# Altium PCB PreTriggerECAL_v3.PcbDoc (part 2 of 3)
Units mm, origin at the board's own origin, x right, y up, seen from the top; angles counter-clockwise.
Board outline 200 x 130 mm, 8 copper layers (Top Layer, Internal Plane 1, Mid-Layer 1, Mid-Layer 2, Mid-Layer 3, Mid-Layer 4, Mid-Layer 5, Bottom Layer), stack 1.695 mm thick; 121 components, 209 nets, 2107 pads, 421 vias.
Unrouted connection lines stored in the file: 26.
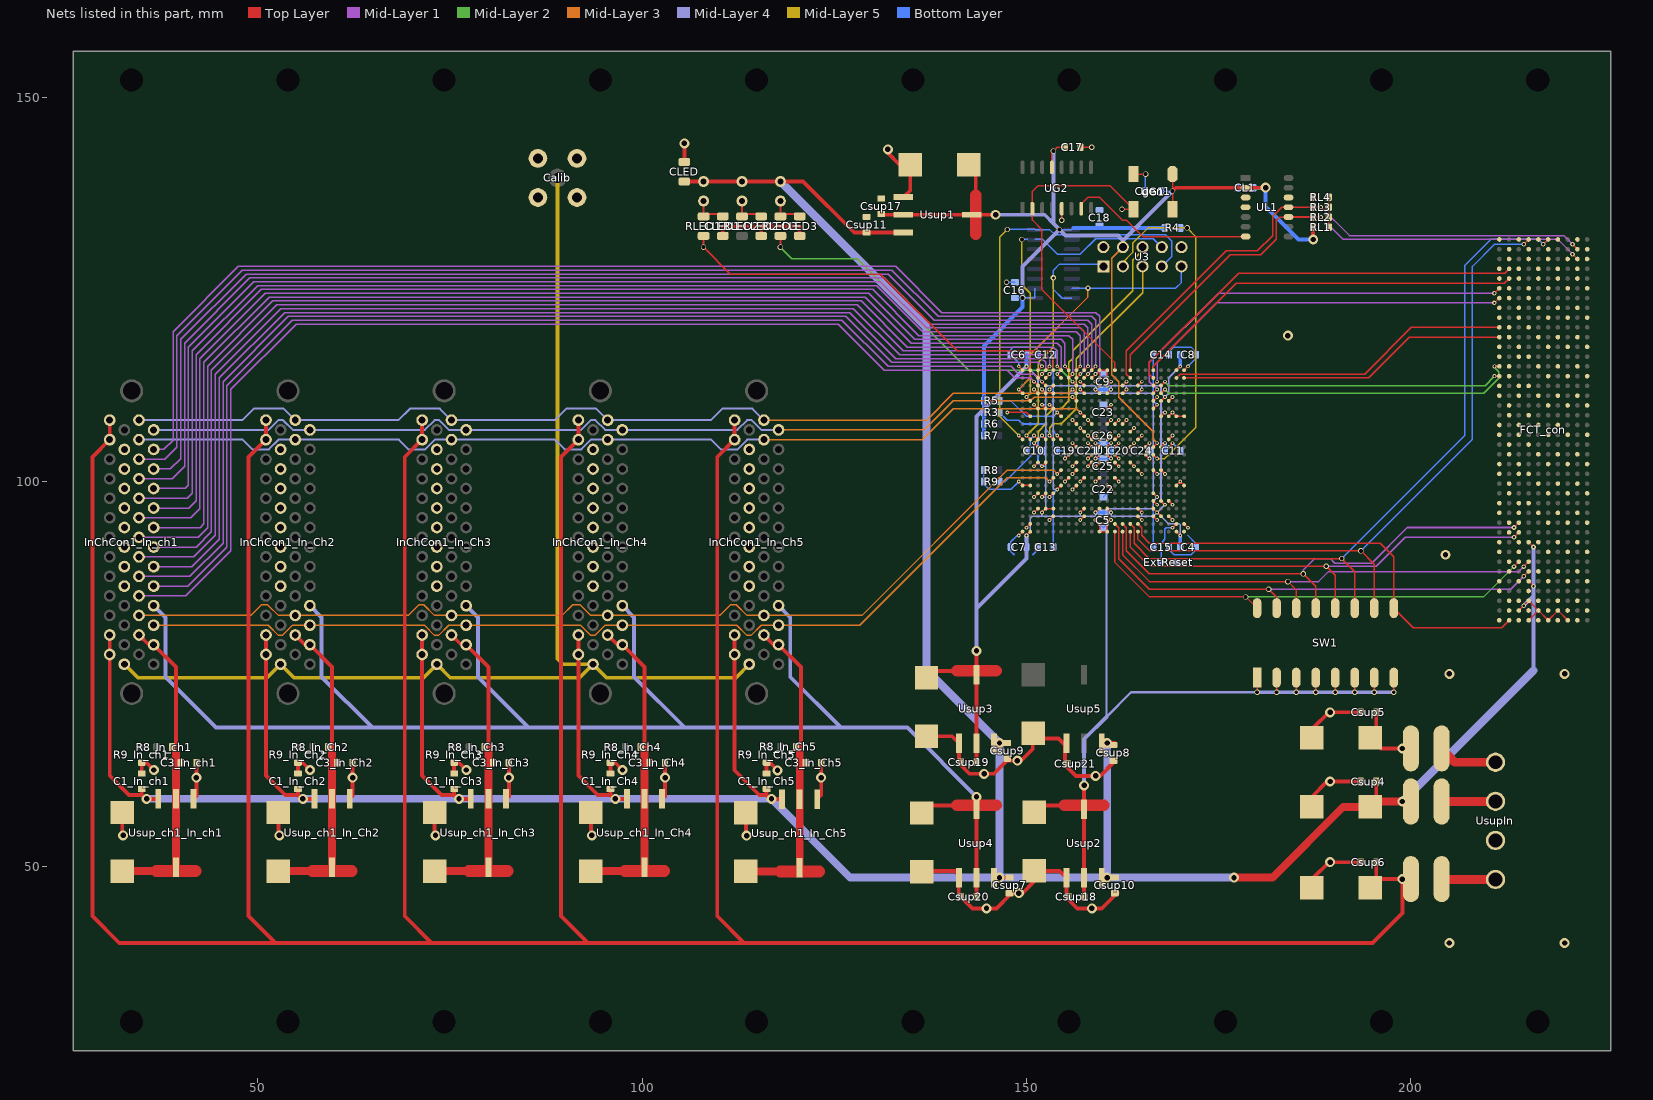
[diagram p8: the nets of this part, all layers, seen from the top]

## Via types
v1: diameter 0.5, hole 0.25, Top Layer to Bottom Layer, tented top, 267 vias
v2: diameter 0.6, hole 0.3, Top Layer to Bottom Layer, 60 vias
v3: diameter 1.3, hole 0.7, Top Layer to Bottom Layer, 50 vias
v4: diameter 0.7, hole 0.5, Top Layer to Bottom Layer, tented top, 30 vias
v5: diameter 0.5, hole 0.3, Top Layer to Bottom Layer, 4 vias
v6: diameter 2, hole 1.27, Top Layer to Bottom Layer, 2 vias
v7: diameter 0.7, hole 0.5, Top Layer to Bottom Layer, 2 vias
v8: diameter 0.7, hole 0.4, Top Layer to Bottom Layer, 2 vias
v9: diameter 1.27, hole 0.711, Top Layer to Bottom Layer, 2 vias
v10: diameter 3, hole 3, Top Layer to Bottom Layer, tented top, 2 vias

## Nets (pads, with @x,y where several pads share a name; then routed paths per layer and width w, separated by ;. In a path a pad name is that pad's centre, name@x,y a point inside that pad or via, vN(x,y) a via of type N, cw(c..) or ccw(c..) an arc to the next point about the centre after c; other vN are vias at no path point) (continued)
"+1.8 V": C2_In_ch1.+ C2_In_Ch2.+ C2_In_Ch3.+ C2_In_Ch4.+ C2_In_Ch5.+ C3_In_ch1.1 C3_In_Ch2.1 C3_In_Ch3.1 C3_In_Ch4.1 C3_In_Ch5.1 InChCon1_In_ch1.A23 InChCon1_In_ch1.A24 InChCon1_In_Ch2.A23 InChCon1_In_Ch2.A24 InChCon1_In_Ch3.A23 InChCon1_In_Ch3.A24 InChCon1_In_Ch4.A23 InChCon1_In_Ch4.A24 InChCon1_In_Ch5.A23 InChCon1_In_Ch5.A24 R8_In_ch1.2 R8_In_Ch2.2 R8_In_Ch3.2 R8_In_Ch4.2 R8_In_Ch5.2 Usup_ch1_In_ch1.2 Usup_ch1_In_ch1.4 Usup_ch1_In_Ch2.2 Usup_ch1_In_Ch2.4 Usup_ch1_In_Ch3.2 Usup_ch1_In_Ch3.4 Usup_ch1_In_Ch4.2 Usup_ch1_In_Ch4.4 Usup_ch1_In_Ch5.2 Usup_ch1_In_Ch5.4 | length 197.7
  Top Layer w0.508: InChCon1_In_ch1.A23@34.572,80.06 35.842,78.79 InChCon1_In_ch1.A24@36.477,78.79 39.37,75.897 39.37,65.479 ; InChCon1_In_Ch2.A23@54.892,80.06 56.162,78.79 InChCon1_In_Ch2.A24@56.797,78.79 59.69,75.897 59.69,65.479 ; InChCon1_In_Ch3.A23@75.212,80.06 76.482,78.79 InChCon1_In_Ch3.A24@77.117,78.79 80.01,75.897 80.01,65.479 ; InChCon1_In_Ch4.A23@95.532,80.06 96.802,78.79 InChCon1_In_Ch4.A24@97.437,78.79 100.33,75.897 100.33,65.479 ; InChCon1_In_Ch5.A23@115.852,80.06 117.122,78.79 InChCon1_In_Ch5.A24@117.757,78.79 120.65,75.897 120.65,65.479
  Top Layer w1.016: C2_In_ch1.+@32.385,49.35 36.83,49.35 Usup_ch1_In_ch1.4@39.37,49.35 ; Usup_ch1_In_ch1.4@39.37,49.858 Usup_ch1_In_ch1.2@39.37,58.748 39.37,65.479 ; C2_In_Ch2.+@52.705,49.35 57.15,49.35 Usup_ch1_In_Ch2.4@59.69,49.35 ; Usup_ch1_In_Ch2.4@59.69,49.858 Usup_ch1_In_Ch2.2@59.69,58.748 59.69,65.479 ; C2_In_Ch3.+@73.025,49.35 77.47,49.35 Usup_ch1_In_Ch3.4@80.01,49.35 ; Usup_ch1_In_Ch3.4@80.01,49.858 Usup_ch1_In_Ch3.2@80.01,58.748 80.01,65.479 ; C2_In_Ch4.+@93.345,49.35 97.79,49.35 Usup_ch1_In_Ch4.4@100.33,49.35 ; Usup_ch1_In_Ch4.4@100.33,49.858 Usup_ch1_In_Ch4.2@100.33,58.748 100.33,65.479 ; C2_In_Ch5.+@113.515,49.302 117.96,49.302 ; 118.11,49.35 Usup_ch1_In_Ch5.4@120.65,49.35 ; Usup_ch1_In_Ch5.4@120.5,49.61 Usup_ch1_In_Ch5.4@120.5,49.81 Usup_ch1_In_Ch5.2@120.5,58.7 120.5,65.231
"+1.8 VDIG": Csup15.+ Csup20.1 InChCon1_In_ch1.A20 InChCon1_In_Ch2.A20 InChCon1_In_Ch3.A20 InChCon1_In_Ch4.A20 InChCon1_In_Ch5.A20 Usup4.2 Usup4.4 | length 218.4
  Top Layer w0.508: Csup15.+@136.89,57.898 140.96,57.898 Usup4.4@143.5,57.898 ; Csup20.1@143.5,46 Csup20.1@143.5,46.356 Usup4.2@143.5,48.5 Usup4.4@143.5,57.39 Usup4.4@143.5,57.898 ; v3(143.5,59) Usup4.4@143.5,57.898
  Mid-Layer 4 w0.508: InChCon1_In_ch1.A20@36.477,83.87 38,82.348 38,74.6 44.6,68 64.92,68 ; InChCon1_In_Ch2.A20@56.797,83.87 58.32,82.348 58.32,74.6 64.92,68 ; InChCon1_In_Ch3.A20@77.117,83.87 78.64,82.348 78.64,74.6 85.24,68 ; InChCon1_In_Ch4.A20@97.437,83.87 98.96,82.348 98.96,74.6 105.56,68 ; InChCon1_In_Ch5.A20@117.757,83.87 119.28,82.348 119.28,74.6 125.88,68 ; v3(143.5,59) 134.5,68 125.88,68 ; 64.92,68 85.24,68 ; 85.24,68 105.56,68 ; 105.56,68 125.88,68
"+2.5 V": C4.2 C5.2 C6.2 C7.2 C8.2 C9.2 C10.2 C11.2 C12.2 C13.2 C14.2 C15.2 Csup13.+ Csup14.+ Csup18.1 Csup19.1 SW1.1 SW1.3 SW1.5 SW1.7 SW1.9 SW1.11 SW1.13 SW1.15 U1.A2 U1.A21 U1.AB2 U1.AB21 U1.D4 U1.D5 U1.D9 U1.D11 U1.D12 U1.D14 U1.D16 U1.E19 U1.F4 U1.F18 U1.G6 U1.G19 U1.K4 U1.L19 U1.N4 U1.P18 U1.T6 U1.U4 U1.U18 U1.V19 U1.W4 U1.W5 U1.W9 U1.W11 U1.W12 U1.W16 U1.W18 U1.Y19 Usup2.2 Usup2.4 Usup3.2 Usup3.4 | length 387.7
  Top Layer w0.175: v1(150,93) U1.AB2@150.5,93.5 ; v1(150,115) U1.A2@150.5,114.5 ; v1(152,96) U1.W4@152.5,96.5 U1.W5@153.5,96.5 ; v1(152,98) U1.U4@152.5,98.5 ; v1(152,102) U1.N4@152.5,102.5 ; v1(152,106) U1.K4@152.5,105.5 ; v1(152,110) U1.F4@152.5,109.5 ; v1(152,112) U1.D4@152.5,111.5 U1.D5@153.5,111.5 ; v1(154,99) U1.T6@154.5,99.5 ; v1(154,109) U1.G6@154.5,108.5 ; v1(157,96) U1.W9@157.5,96.5 ; v1(157,112) U1.D9@157.5,111.5 ; v1(159,96) U1.W11@159.5,96.5 ; v1(159,112) U1.D11@159.5,111.5 ; U1.W12@160.5,96.5 v1(161,96) ; U1.D12@160.5,111.5 v1(161,112) ; U1.D14@162.5,111.5 v1(163,112) ; U1.W16@164.5,96.5 v1(165,96) ; U1.D16@164.5,111.5 v1(165,112) ; U1.W18@166.5,96.5 v1(167,96) U1.Y19@167.5,95.5 ; U1.U18@166.5,98.5 v1(167,98) ; U1.P18@166.5,101.5 v1(167,101) ; U1.F18@166.5,109.5 v1(167,110) ; U1.V19@167.5,97.5 v1(168,97) ; U1.L19@167.5,104.5 v1(168,105) ; U1.G19@167.5,108.5 v1(168,109) ; U1.E19@167.5,110.5 v1(168,111) ; U1.AB21@169.5,93.5 v1(170,93) ; U1.A21@169.5,114.5 v1(170,115)
  Top Layer w0.2: v4(180,72.6) SW1.1@180,74.5 ; v4(182.54,72.6) SW1.3@182.54,74.5 ; v4(185.08,72.6) SW1.5@185.08,74.5 ; v4(187.62,72.6) SW1.7@187.62,74.5 ; v4(190.16,72.6) SW1.9@190.16,74.5 ; v4(192.7,72.6) SW1.11@192.7,74.5 ; v4(195.24,72.6) SW1.13@195.24,74.5 ; v4(197.78,72.6) SW1.15@197.78,74.5
  Top Layer w0.508: Csup14.+@136.89,75.398 143.5,75.398 v3(143.5,78) ; Csup19.1@143.5,63.356 Csup19.1@143.5,63.5 Csup19.1@143.5,63.856 Usup3.4@143.5,74.89 ; Csup13.+@150.89,57.898 154.96,57.898 157.5,57.898 v3(157.5,60.5) ; Csup18.1@157.5,45.856 Csup18.1@157.5,46 Csup18.1@157.5,46.356 Usup2.2@157.5,48.5 Usup2.4@157.5,57.39
  Mid-Layer 4 w0.2: v1(150,93) 150.5,93.5 150.5,95.207 150.793,95.5 152,95.5 ; v1(150,115) 151.5,113.5 151.5,112.5 152.5,111.5 ; v1(152,98) 152.5,98 ; v1(152,102) 152.5,102 ; v1(152,110) 152.5,110 ; v1(154,99) 153.5,99 153.5,108.5 ; v1(154,109) 153.5,108.5 ; v1(157,96) 157,95.5 ; v1(157,112) 157,112.5 ; v1(159,96) 159,95.5 157,95.5 ; v1(159,112) 159,112.5 ; 160.6,96.5 166.3,96.5 166.5,96.7 166.5,97.5 v1(167,98) 166.5,98.5 166.5,109.5 ; v1(161,96) 161,95.5 165,95.5 ; v1(161,112) 161,112.5 ; v1(163,112) 163,112.5 ; v1(165,96) 165,95.5 ; v1(165,112) 165,112.5 ; v1(167,101) 167.5,101 ; v1(167,110) 166.5,109.5 ; 167.5,109 v1(168,109) ; v1(168,105) 167.5,105 ; v1(170,93) 170,94.4 169.9,94.5 168.5,94.5 v1(167,96) ; v1(170,115) 168.5,113.5 168.5,111.5 v1(168,111) ; 152,95.5 v1(152,96) 152.5,96.5 152.5,98 ; 152,95.5 157,95.5 ; 152.5,98 152.5,102 ; 152.5,102 152.5,110 ; 152.5,110 152.5,111.5 ; 152.5,111.5 152.5,112.5 157,112.5 ; 153.5,108.5 153.5,111.3 153.7,111.5 163.793,111.5 166.207,111.5 166.5,111.207 166.5,109.5 ; 157,112.5 163,112.5 ; 163,112.5 165,112.5 ; 165,95.5 166.5,95.5 v1(167,96) ; 165,112.5 167.3,112.5 167.5,112.3 167.5,111.5 v1(168,111) ; v1(167,96) v1(168,97) 167.5,97.5 167.5,105 ; 167.5,105 167.5,110.5 v1(168,111)
  Mid-Layer 4 w0.3: 160.6,96.5 160.4,96.3 160.4,69.4 163.6,72.6 v4(180,72.6)
  Mid-Layer 4 w0.5: v4(180,72.6) v4(182.54,72.6) v4(185.08,72.6) v4(187.62,72.6) v4(190.16,72.6) v4(192.7,72.6) v4(195.24,72.6) v4(197.78,72.6)
  Mid-Layer 4 w0.508: v3(143.5,78) 143.5,83.5 ; v1(150,93) 150,90 143.5,83.5 ; v1(150,115) 143.5,108.5 143.5,83.5 ; v3(157.5,60.5) 157.5,66.5 160.4,69.4
  Bottom Layer w0.2: v1(152,102) 151.5,102.5 151.5,105.5 v1(152,106) ; C13.2@153.497,91.5 153.497,98.497 v1(154,99) ; C12.2@153.5,116.5 C12.2@153.5,116.144 153.5,109.5 v1(154,109) ; C15.2@166.5,91.5 C15.2@166.5,91.856 166.5,97.5 v1(167,98) ; C14.2@166.5,116.5 166.5,110.5 v1(167,110)
  Bottom Layer w0.508: C7.2@150,91.5 C7.2@150,91.856 v1@150,92.996 ; v1(150,115) C6.2@150,116.144 C6.2@150,116.5 ; v1(159,96) C5.2@159.644,96 ; v1(159,112) C9.2@159.644,112 ; C5.2@160,96 C5.2@160.356,96 v1(161,96) ; C9.2@160,112 C9.2@160.356,112 v1(161,112) ; C11.2@168,104.356 v1(168,105) ; C4.2@170,91.856 v1(170,93) ; v1(170,115) C8.2@170,116.144 C8.2@170,116.5
"+3.3 V": C16.2 C17.2 C18.1 Cgen1.2 CL1.1 Csup12.+ Csup17.1 R3.1 R4.1 R5.1 R6.1 R7.1 RL1.2 U1.L18 U3.4 UG1.1 UG1.4 UG2.13 UL1.2 Usup1.2 Usup1.4 | length 171.1
  Top Layer w0.175: U1.L18@166.5,104.5 v1(167,105)
  Top Layer w0.2: UG2.13@153.31,140.885 153.31,142.81 v4(153.5,143) 154,143.5 C17.2@154.714,143.5 ; UG1.4@169,135.428 v4(169,137.8) UG1.1@169,140
  Top Layer w0.508: Csup17.1@131.268,134.714 Usup1.2@134,134.714 Usup1.4@142.89,134.714 ; Csup12.+@143.398,141.324 143.398,137.254 143.398,134.714 v3(146,134.714) ; v4(169,137.8) 169.43,138.23 UL1.2@178.5,138.23 v3(181.102,138.23) ; RL1.2@187.268,133.1 RL1.2@187.268,132.744 187.268,131.532 v3(187.3,131.5)
  Mid-Layer 3 w0.175: U3.4@162.54,130.5 161.075,129.035 161.075,113.925 162,113 162,111 166.5,106.5 166.5,105.5 v1(167,105)
  Mid-Layer 4 w0.508: v3(146,134.714) 152.376,134.714 153.5,133.59 ; v4(149.5,123.9) 149.5,127.99 v4(154.3,132.79) ; v4(153.5,143) 153.5,133.59 ; U3.4@162.54,130.5 162.54,131.34 ; v4(169,137.8) 162.54,131.34 ; 153.5,133.59 v4(154.3,132.79) ; v4(154.3,132.79) 155.09,132 161.88,132 162.54,131.34
  Bottom Layer w0.2: C16.2@148.856,123.9 v4(149.5,123.9) 151.1,123.9 151.1,125.17 ; v4(154.3,132.79) 155.9,132.79 ; Cgen1.2@167.286,137.8 Cgen1.2@167.5,137.8 Cgen1.2@167.754,137.8 v4(169,137.8)
  Bottom Layer w0.508: R7.1@144.468,106 R7.1@144.468,106.356 R6.1@144.468,107.144 R6.1@144.468,107.5 R3.1@144.468,108.644 R3.1@144.468,109 R3.1@144.468,109.356 144.468,117.668 149.5,122.7 v4(149.5,123.9) ; 156.11,133 R4.1@167.746,133 R4.1@168,133 ; CL1.1@179.5,138.23 CL1.1@179.754,138.23 v3(181.102,138.23) 181.102,135.798 185.4,131.5 v3(187.3,131.5)
"+5 V": C1_In_ch1.1 C1_In_Ch2.1 C1_In_Ch3.1 C1_In_Ch4.1 C1_In_Ch5.1 CLED.1 Csup1.+ Csup4.1 Csup7.1 Csup8.1 Csup9.1 Csup10.1 Csup11.1 FCT_con.C39 FCT_con.D32 FCT_con.D36 FCT_con.D38 FCT_con.D40 FCT_con.E39 FCT_con.F40 FCT_con.G39 FCT_con.H40 InChCon1_In_ch1.B23 InChCon1_In_ch1.B25 InChCon1_In_Ch2.B23 InChCon1_In_Ch2.B25 InChCon1_In_Ch3.B23 InChCon1_In_Ch3.B25 InChCon1_In_Ch4.B23 InChCon1_In_Ch4.B25 InChCon1_In_Ch5.B23 InChCon1_In_Ch5.B25 Lref1.2 Usup1.3 Usup2.3 Usup3.3 Usup4.3 Usup5.3 Usup_ch1_In_ch1.3 Usup_ch1_In_Ch2.3 Usup_ch1_In_Ch3.3 Usup_ch1_In_Ch4.3 Usup_ch1_In_Ch5.3 VDLED1.ANOD VDLED2.ANOD VDLED3.ANOD | length 516.1
  Top Layer w0.2: FCT_con.C39@214.04,83.24 v2(214.675,83.875) FCT_con.D38@215.31,84.51 FCT_con.E39@216.58,83.24 ; FCT_con.D40@215.31,81.97 FCT_con.E39@216.58,83.24 ; FCT_con.D36@215.31,87.05 v2(215.945,86.415) ; FCT_con.D32@215.31,92.13 v2(215.945,91.495) ; FCT_con.H40@220.39,81.97 FCT_con.G39@219.12,83.24 FCT_con.F40@217.85,81.97 FCT_con.E39@216.58,83.24
  Top Layer w0.508: InChCon1_In_ch1.B23@30.762,80.06 InChCon1_In_ch1.B25@30.762,77.52 30.762,61.768 33.274,59.256 34.925,59.256 ; C1_In_ch1.1@34.925,59.764 34.925,59.256 ; Usup_ch1_In_ch1.3@37.084,58.748 v3(35.56,58.748) 35.433,58.748 34.925,59.256 ; InChCon1_In_Ch2.B23@51.082,80.06 InChCon1_In_Ch2.B25@51.082,77.52 51.082,61.768 53.594,59.256 55.245,59.256 ; C1_In_Ch2.1@55.245,59.764 55.245,59.256 ; Usup_ch1_In_Ch2.3@57.404,58.748 v3(55.88,58.748) 55.753,58.748 55.245,59.256 ; InChCon1_In_Ch3.B23@71.402,80.06 InChCon1_In_Ch3.B25@71.402,77.52 71.402,61.768 73.914,59.256 75.565,59.256 ; C1_In_Ch3.1@75.565,59.764 75.565,59.256 ; Usup_ch1_In_Ch3.3@77.724,58.748 v3(76.2,58.748) 76.073,58.748 75.565,59.256 ; InChCon1_In_Ch4.B23@91.722,80.06 InChCon1_In_Ch4.B25@91.722,77.52 91.722,61.768 94.234,59.256 95.885,59.256 ; C1_In_Ch4.1@95.885,59.764 95.885,59.256 ; Usup_ch1_In_Ch4.3@98.044,58.748 v3(96.52,58.748) 96.393,58.748 95.885,59.256 ; CLED.1@106.008,139.04 VDLED1.ANOD@108,139.04 VDLED2.ANOD@113,139.04 VDLED3.ANOD@118,139.04 120.96,139.04 127.6,132.4 Csup11.1@128.844,132.4 Csup11.1@128.946,132.4 ; InChCon1_In_Ch5.B23@112.042,80.06 InChCon1_In_Ch5.B25@112.042,77.52 112.042,62.457 115.244,59.256 116.205,59.256 ; C1_In_Ch5.1@116.205,59.764 116.205,59.256 ; Usup_ch1_In_Ch5.3@118.214,58.7 118.166,58.748 v3(116.84,58.748) 116.713,58.748 116.205,59.256 ; Csup11.1@129.228,132.428 Usup1.3@134,132.428 ; Usup4.3@145.786,48.5 v3(146.5,48.5) Csup7.1@147.444,48.5 ; Usup3.3@145.786,66 v3(146.5,66) Csup9.1@147.144,66 Csup9.1@147.444,66 ; Usup2.3@159.786,48.5 v3(160.5,48.5) Csup10.1@161.144,48.5 Csup10.1@161.444,48.5 ; Usup5.3@159.786,66 v3(160.5,66) Csup8.1@161.444,66 ; Csup1.+@195.4,58.4 195.5,58.5 Csup4.1@195.5,60.644 Csup4.1@195.5,61
  Top Layer w1.016: v3(177,48.5) 182,48.5 191.2,57.7 Csup1.+@194.7,57.7 ; Csup1.+@195.4,58.4 v3(198.9,58.4)
  Mid-Layer 4 w0.5: v2(214.675,83.875) 215.945,85.145 ; 215.945,75.445 215.945,85.145 ; v2(215.945,91.495) v2(215.945,86.415) 215.945,85.145
  Mid-Layer 4 w1.016: v3(35.56,58.748) v3(55.88,58.748) v3(76.2,58.748) v3(96.52,58.748) v3(116.84,58.748) 127.088,48.5 v3(146.5,48.5) ; VDLED3.ANOD@118,139.04 137,120.04 137,75.5 v3(146.5,66) v3(146.5,48.5) ; v3(160.5,66) v3(160.5,48.5) ; v3(177,48.5) v3(160.5,48.5) ; v3(198.9,58.4) 215.945,75.445 ; v3(146.5,48.5) v3(160.5,48.5)
"+5IN V": Lref1.1 UsupIn.2 | length 7
  Top Layer w1.16: Lref1.1@204,58.42 UsupIn.2@211,58.42
"+12 V": Csup2.+ Csup5.1 Lref2.2 | length 8.4
  Top Layer w0.254: Csup2.+@195.5,67.5 Csup2.+@194.7,66.7 Csup2.+@196.1,65.3 ; Csup5.1@195.5,69.644 Csup5.1@195.5,70
  Top Layer w0.508: Csup2.+@195.5,67.5 Csup5.1@195.5,69.644 ; Csup2.+@196.1,65.3 v3(198.9,65.3)
"+12IN V": Lref2.1 UsupIn.1 | length 7.8
  Top Layer w1.16: Lref2.1@203.93,65.278 205.708,63.5 UsupIn.1@211,63.5
"-5 V": Csup3.+ Csup6.1 InChCon1_In_ch1.B1 InChCon1_In_ch1.B3 InChCon1_In_Ch2.B1 InChCon1_In_Ch2.B3 InChCon1_In_Ch3.B1 InChCon1_In_Ch3.B3 InChCon1_In_Ch4.B1 InChCon1_In_Ch4.B3 InChCon1_In_Ch5.B1 InChCon1_In_Ch5.B3 Lref3.2 | length 530.9
  Top Layer w0.508: InChCon1_In_ch1.B1@30.762,108 InChCon1_In_ch1.B3@30.762,105.46 28.5,103.198 28.5,43.5 32,40 195,40 198.9,43.9 v3(198.9,48.3) 195.8,48.3 195.5,48 Csup6.1@195.5,50.144 Csup6.1@195.5,50.5 ; InChCon1_In_Ch2.B1@51.082,108 InChCon1_In_Ch2.B3@51.082,105.46 48.82,103.198 48.82,43.5 52.32,40 ; InChCon1_In_Ch3.B1@71.402,108 InChCon1_In_Ch3.B3@71.402,105.46 69.14,103.198 69.14,43.5 72.64,40 ; InChCon1_In_Ch4.B1@91.722,108 InChCon1_In_Ch4.B3@91.722,105.46 89.46,103.198 89.46,43.5 92.96,40 ; InChCon1_In_Ch5.B1@112.042,108 InChCon1_In_Ch5.B3@112.042,105.46 109.78,103.198 109.78,43.5 113.28,40
"-5IN V": Lref3.1 UsupIn.4 | length 7
  Top Layer w1.16: Lref3.1@204,48.26 UsupIn.4@211,48.26
ADC_CLK_N: InChCon1_In_ch1.A22 InChCon1_In_Ch2.A22 InChCon1_In_Ch3.A22 InChCon1_In_Ch4.A22 InChCon1_In_Ch5.A22 U1.R5 | length 129.8
  Top Layer w0.175: v1(153,100) U1.R5@153.5,100.5
  Mid-Layer 3 w0.2: InChCon1_In_ch1.A22@36.477,81.33 51.37,81.33 52.7,80 53.2,80 54.53,81.33 InChCon1_In_Ch2.A22@56.797,81.33 71.69,81.33 73.02,80 73.52,80 74.85,81.33 InChCon1_In_Ch3.A22@77.117,81.33 92.01,81.33 93.34,80 93.84,80 95.17,81.33 InChCon1_In_Ch4.A22@97.437,81.33 112.33,81.33 113.66,80 114.16,80 115.49,81.33 InChCon1_In_Ch5.A22@117.757,81.33 128.33,81.33 147.5,100.5 152.5,100.5 v1(153,100)
ADC_CLK_P: InChCon1_In_ch1.A21 InChCon1_In_Ch2.A21 InChCon1_In_Ch3.A21 InChCon1_In_Ch4.A21 InChCon1_In_Ch5.A21 U1.P6 | length 132.8
  Top Layer w0.175: v1(154,101) U1.P6@154.5,101.5
  Mid-Layer 3 w0.2: InChCon1_In_ch1.A21@34.572,82.6 49.1,82.6 50.5,84 51.3,84 52.7,82.6 InChCon1_In_Ch2.A21@54.892,82.6 69.6,82.6 71,84 71.62,84 73.02,82.6 InChCon1_In_Ch3.A21@75.212,82.6 89.6,82.6 91,84 91.94,84 93.34,82.6 InChCon1_In_Ch4.A21@95.532,82.6 110.1,82.6 111.5,84 112.26,84 113.66,82.6 InChCon1_In_Ch5.A21@115.852,82.6 128.6,82.6 147.5,101.5 153.5,101.5 v1(154,101)
ADC_CSB: InChCon1_In_ch1.A1 InChCon1_In_Ch2.A1 InChCon1_In_Ch3.A1 InChCon1_In_Ch4.A1 InChCon1_In_Ch5.A1 U1.D8 | length 128.8
  Top Layer w0.175: v1@155.975,112 v1(156,112) U1.D8@156.5,111.5
  Mid-Layer 3 w0.175: InChCon1_In_Ch5.A1@115.852,108 137,108 140.5,111.5 155.5,111.5 v1(156,112)
  Mid-Layer 4 w0.254: InChCon1_In_ch1.A1@34.572,108 48,108 49.5,109.5 53.392,109.5 InChCon1_In_Ch2.A1@54.892,108 68.32,108 69.82,109.5 73.712,109.5 InChCon1_In_Ch3.A1@75.212,108 88.64,108 90.14,109.5 94.032,109.5 InChCon1_In_Ch4.A1@95.532,108 108.96,108 110.46,109.5 114.352,109.5 InChCon1_In_Ch5.A1@115.852,108
ADC_SCLK: InChCon1_In_ch1.A3 InChCon1_In_Ch2.A3 InChCon1_In_Ch3.A3 InChCon1_In_Ch4.A3 InChCon1_In_Ch5.A3 U1.G9 | length 129.2
  Top Layer w0.175: v1(157,109) U1.G9@157.5,108.5
  Mid-Layer 3 w0.175: InChCon1_In_Ch5.A3@115.852,105.46 136.46,105.46 140.5,109.5 156.5,109.5 v1(157,109)
  Mid-Layer 4 w0.254: InChCon1_In_ch1.A3@34.572,105.46 48.04,105.46 49.3,104.2 51.457,104.2 52.717,105.46 InChCon1_In_Ch2.A3@54.892,105.46 68.36,105.46 69.62,104.2 71.777,104.2 73.037,105.46 InChCon1_In_Ch3.A3@75.212,105.46 88.68,105.46 89.94,104.2 92.097,104.2 93.357,105.46 InChCon1_In_Ch4.A3@95.532,105.46 109,105.46 110.26,104.2 112.417,104.2 113.677,105.46 InChCon1_In_Ch5.A3@115.852,105.46
ADC_SDIO/ODM: InChCon1_In_ch1.A2 InChCon1_In_Ch2.A2 InChCon1_In_Ch3.A2 InChCon1_In_Ch4.A2 InChCon1_In_Ch5.A2 U1.E8 | length 126.2
  Top Layer w0.175: v1(156,111) U1.E8@156.5,110.5
  Mid-Layer 3 w0.175: InChCon1_In_Ch5.A2@117.757,106.73 136.73,106.73 140.5,110.5 150.5,110.5 151,111 v1(156,111)
  Mid-Layer 4 w0.254: InChCon1_In_ch1.A2@36.477,106.73 51.43,106.73 52.7,108 53.3,108 54.57,106.73 InChCon1_In_Ch2.A2@56.797,106.73 71.75,106.73 73.02,108 73.62,108 74.89,106.73 InChCon1_In_Ch3.A2@77.117,106.73 92.07,106.73 93.34,108 93.94,108 95.21,106.73 InChCon1_In_Ch4.A2@97.437,106.73 112.39,106.73 113.66,108 114.26,108 115.53,106.73 InChCon1_In_Ch5.A2@117.757,106.73
"AS ASD": U1.D1 U3.9 | length 34.3
  Top Layer w0.175: v1(149,112) U1.D1@149.5,111.5
  Mid-Layer 3 w0.2: v1(149,112) 150.5,113.5 150.5,116.5 158,124 v8(158,125.17)
  Bottom Layer w0.2: 155.9,125.17 v8(158,125.17) 169.43,125.17 170.16,125.9 U3.9@170.16,128
"AS DATA": U1.K1 U3.7 | length 54.8
  Top Layer w0.175: v1(149,106) U1.K1@149.5,105.5
  Mid-Layer 5 w0.2: v4(147.5,132.8) 146.5,131.8 146.5,108.5 v1(149,106)
  Bottom Layer w0.2: v4(147.5,132.8) 151.09,132.8 151.1,132.79 153.01,132.79 153.7,132.1 168.1,132.1 168.9,131.3 168.9,129.3 U3.7@167.6,128
"AS DCLK": U1.K2 U3.1 | length 35
  Top Layer w0.175: v1(150,106) U1.K2@150.5,105.5
  Mid-Layer 5 w0.175: v1(150,106) 151.5,107.5 151.5,115.5 153.5,117.5 v8(153.5,126.5)
  Bottom Layer w0.2: 155.9,123.9 155.9,123.855 154.645,123.855 153.5,125 v8(153.5,126.5) 153.5,127.5 154.3,128.3 159.7,128.3 U3.1@160,128
"AS NCE": R9.1 U1.L3 U3.6 | length 39.7
  Top Layer w0.175: v1(151,105) U1.L3@151.5,104.5
  Mid-Layer 5 w0.175: v1(151,105) 151.5,105.5 151.5,106.5 152.5,107.5 152.5,108.5 153.5,109.5 154.5,109.5 155.5,110.5 155.5,115.5 156,116 156,117 163.8,124.8 163.8,128.8 165.1,130.1 U3.6@165.1,130.5
  Bottom Layer w0.2: R9.1@146.754,100 147.2,100 151,103.8 v1(151,105)
"AS NCS": U1.E2 U3.8 | length 41.2
  Top Layer w0.175: v1(150,111) U1.E2@150.5,110.5
  Mid-Layer 5 w0.2: v4(149.4,131.5) 149.4,125.6 150.5,124.5 150.5,111.5 v1(150,111)
  Bottom Layer w0.2: v4(149.4,131.5) 150.144,131.5 ; 151.1,131.52 152.08,131.52 154,129.6 157,129.6 159,131.6 166.5,131.6 U3.8@167.6,130.5
"BEAM TIME_N": FCT_con.B5 U1.A18 | length 51.5
  Top Layer w0.175: U1.A18@166.5,114.5 166.5,115 177.3,125.8 212.15,125.8 FCT_con.B5@212.77,126.42
"BEAM TIME_P": FCT_con.B4 U1.B18 | length 54
  Top Layer w0.175: U1.B18@166.5,113.5 166,114 166,115.5 177.6,127.1 212.18,127.1 FCT_con.B4@212.77,127.69
BUSY_N: FCT_con.A7 U1.C18 | length 51.2
  Top Layer w0.175: U1.C18@166.5,112.5 v1(167,113)
  Top Layer w0.2: v2(210.865,123.245) FCT_con.A7@211.5,123.88
  Mid-Layer 1 w0.175: v1(167,113) 167,115.5 174.745,123.245 v2(210.865,123.245)
BUSY_P: FCT_con.A6 U1.D18 | length 54.1
  Top Layer w0.175: U1.D18@166.5,111.5 v1(167,112)
  Top Layer w0.2: v2(210.865,124.515) FCT_con.A6@211.5,125.15
  Mid-Layer 1 w0.175: v1(167,112) 166,113 166,115.5 175.015,124.515 v2(210.865,124.515)
CALIB: InChCon1_In_ch1.B26 InChCon1_In_Ch2.B26 InChCon1_In_Ch3.B26 InChCon1_In_Ch4.B26 InChCon1_In_Ch5.B26 | length 154.5
  Mid-Layer 5 w0.508: InChCon1_In_ch1.B26@32.667,76.25 34.417,74.5 51.238,74.5 InChCon1_In_Ch2.B26@52.987,76.25 54.737,74.5 71.558,74.5 InChCon1_In_Ch3.B26@73.307,76.25 75.057,74.5 91.878,74.5 InChCon1_In_Ch4.B26@93.627,76.25 ; 89,139.5 89,77 89.75,76.25 InChCon1_In_Ch4.B26@93.627,76.25 ; InChCon1_In_Ch5.B26@113.947,76.25 112.198,74.5 95.377,74.5 InChCon1_In_Ch4.B26@93.627,76.25
CLK_LIGHT: RLED1.2 U1.A5 | length 54.8
  Top Layer w0.175: v4(108,130.5) 111.5,127 131,127 141,117 153,117 153.5,116.5 U1.A5@153.5,114.5
  Top Layer w0.3: v4(108,130.5) RLED1.2@108,131.746
  Top Layer w0.5: RLED1.2@108,131.746 RLED1.2@108,132
CONF_DONE: R4.2 U1.M18 U3.3 | length 46.2
  Top Layer w0.175: U1.M18@166.5,103.5 v1(167,103)
  Mid-Layer 5 w0.2: U3.3@162.54,128 162.54,128.54 163.8,129.8 163.8,131 165.8,133 v7(170.9,133) 172,131.9 172,107 168,103 v1(167,103)
  Bottom Layer w0.2: R4.2@170,133 R4.2@170.032,133 R4.2@170.286,133 v7(170.9,133)
"DETECTOR_BOARD ID 1": FCT_con.C34 SW1.2 U1.AB13 | length 62.4
  Top Layer w0.2: U1.AB13@161.5,93.5 161.5,89.5 166,85 178.55,85 SW1.2@180,83.55 ; v2(213.405,88.955) FCT_con.C34@214.04,89.59
  Mid-Layer 2 w0.2: v4(178.5,85) 209.45,85 v2(213.405,88.955)
"DETECTOR_BOARD ID 2": FCT_con.D35 SW1.4 U1.AA13 | length 63.5
  Top Layer w0.175: U1.AA13@161.5,94.5 162,94 162,90 166,86 v4(181.5,86) 182.54,84.96 SW1.4@182.54,83.55
  Top Layer w0.2: v2(214.675,87.685) FCT_con.D35@215.31,88.32
  Mid-Layer 1 w0.175: v4(181.5,86) 212.99,86 v2(214.675,87.685)
"DETECTOR_BOARD ID 3": FCT_con.D34 SW1.6 U1.AB14 | length 62.2
  Top Layer w0.2: U1.AB14@162.5,93.5 162.5,90.5 166,87 v4(184,87) 185.08,85.92 SW1.6@185.08,83.55 ; v2(214.675,88.955) FCT_con.D34@215.31,89.59
  Mid-Layer 1 w0.2: v4(184,87) 188,87 189.3,88.3 214.02,88.3 v2(214.675,88.955)
"DETECTOR_BOARD ID 4": FCT_con.C30 SW1.8 U1.AA14 | length 64.7
  Top Layer w0.175: U1.AA14@162.5,94.5 163,94 163,91 166,88 v4(186,88) 187.62,86.38 SW1.8@187.62,83.55
  Top Layer w0.2: v2(213.405,94.035) FCT_con.C30@214.04,94.67
  Mid-Layer 1 w0.2: v4(186,88) 186,88.5 187.5,90 189.5,90 190.1,89.4 194.9,89.4 199.535,94.035 v2(213.405,94.035)
"DETECTOR_BOARD ID 5": FCT_con.C31 SW1.10 U1.AB15 | length 61.3
  Top Layer w0.2: U1.AB15@163.5,93.5 163.5,91.5 166,89 v4(189,89) 190.16,87.84 SW1.10@190.16,83.55 ; v2(213.405,92.765) FCT_con.C31@214.04,93.4
  Mid-Layer 1 w0.2: v4(189,89) 195.5,89 199.265,92.765 v2(213.405,92.765)
"DETECTOR_BOARD ID 6": FCT_con.F1 SW1.12 U1.AA15 | length 95.2
  Top Layer w0.175: U1.AA15@163.5,94.5 164,94 164,92 166,90 v4(191,90) 192.7,88.3 SW1.12@192.7,83.55
  Top Layer w0.2: v2(217.215,130.865) FCT_con.F1@217.85,131.5
  Bottom Layer w0.2: v4(191,90) 207,106 207,128.1 210.4,131.5 216.58,131.5 v2(217.215,130.865)
"DETECTOR_BOARD ID 7": FCT_con.D1 SW1.14 U1.AB16 | length 90.6
  Top Layer w0.2: U1.AB16@164.5,93.5 164.5,92.5 166,91 v4(193.5,91) 195.24,89.26 SW1.14@195.24,83.55 ; v2(214.675,130.865) FCT_con.D1@215.31,131.5
  Bottom Layer w0.2: v4(193.5,91) 208,105.5 208,128 210.865,130.865 v2(214.675,130.865)
"DETECTOR_BOARD ID 8": FCT_con.B40 SW1.16 U1.AA16 | length 58.8
  Top Layer w0.175: U1.AA16@164.5,94.5 165,94 165,93 166,92 196,92 197.78,90.22 SW1.16@197.78,83.55 200.33,81 211.8,81 FCT_con.B40@212.77,81.97
ERR_LIGHT: RLED3.2 U1.C8 | length 47.5
  Top Layer w0.175: v1(156,113) U1.C8@156.5,112.5
  Top Layer w0.3: v4(118,130.5) RLED3.2@118,131.706 RLED3.2@118,131.746
  Top Layer w0.5: RLED3.2@118,131.746 RLED3.2@118,131.96 RLED3.2@118,132
  Mid-Layer 2 w0.175: v4(118,130.5) 119.5,129 128,129 142.5,114.5 154.5,114.5 v1(156,113)
EXT_RESET: ExtReset.1 U1.AA21 | length 5.9
  Top Layer w0.175: v1(169,94) U1.AA21@169.5,94.5
  Bottom Layer w0.175: ExtReset.1@167.5,89.856 167.5,92 168,92.5 168,93.8 168.2,94 v1(169,94)
FCT_CLK: UG2.7 UL1.7 | length 24.5
  Top Layer w0.2: UG2.7@157.12,135.5 157.12,136.12 158,137 159.5,137 162.5,134 163,134 165.12,131.88 UL1.7@178.5,131.88
FCT_CLK_40MHZ_N: FCT_con.J3 RL2.2 U1.A15 UL1.10 | length 71.3
  Top Layer w0.175: U1.A15@163.5,114.5 163.5,116.5 176.5,129.5 180.5,129.5 182.5,131.5 182.5,134 182.92,134.42 UL1.10@184.088,134.42
  Top Layer w0.2: UL1.10@184.088,134.42 RL2.2@187.248,134.42 ; RL2.2@187.268,134.4 RL2.2@187.522,134.4 v5(188.3,134.4) ; v2(221.025,129.595) FCT_con.J3@221.66,128.96
  Mid-Layer 1 w0.2: v5(188.3,134.4) 191.2,131.5 219.12,131.5 v2(221.025,129.595)
FCT_CLK_40MHZ_P: FCT_con.J2 RL3.2 U1.B15 UL1.11 | length 73.8
  Top Layer w0.175: U1.B15@163.5,113.5 163,114 163,117 176,130 180,130 182,132 182,134.5 183.19,135.69 UL1.11@184.088,135.69
  Top Layer w0.2: UL1.11@184.088,135.69 184.098,135.7 RL3.2@187.014,135.7 RL3.2@187.268,135.7 RL3.2@187.522,135.7 v5(188.3,135.7) ; v2(221.025,130.865) FCT_con.J2@221.66,130.23
  Mid-Layer 1 w0.2: v5(188.3,135.7) 192,132 219.89,132 v2(221.025,130.865)
FCT_CLK_160MHZ_N: FCT_con.A11 U1.B22 | length 43.2
  Top Layer w0.175: U1.B22@170.5,113.5 194.5,113.5 199.8,118.8 FCT_con.A11@211.5,118.8
FCT_CLK_160MHZ_P: FCT_con.A10 U1.B21 | length 44.7
  Top Layer w0.175: U1.B21@169.5,113.5 170,114 194,114 200.07,120.07 FCT_con.A10@211.5,120.07
FQUARTZ: U1.A13 UG1.3 UG2.2 | length 43.9
  Top Layer w0.2: U1.A13@161.5,114.5 161.5,115.5 152,125 152,132.8 150.77,134.03 UG2.2@150.77,135.5 150.77,137.77 151.5,138.5 160.848,138.5 UG1.3@163.92,135.428 v4(162.42,135.428)
GND: C1_In_ch1.2 C1_In_Ch2.2 C1_In_Ch3.2 C1_In_Ch4.2 C1_In_Ch5.2 C2_In_ch1.- C2_In_Ch2.- C2_In_Ch3.- C2_In_Ch4.- C2_In_Ch5.- C3_In_ch1.2 C3_In_Ch2.2 C3_In_Ch3.2 C3_In_Ch4.2 C3_In_Ch5.2 C4.1 C5.1 C6.1 C7.1 C8.1 C9.1 C10.1 C11.1 C12.1 C13.1 C14.1 C15.1 C16.1 C17.1 C18.2 C19.1 C20.1 C21.1 C22.1 C23.1 C24.1 C25.1 C26.1 Calib.SHIELD Cgen1.1 CL1.2 CLED1.2 CLED2.2 CLED3.2 CLED.2 Csup1.- Csup2.- Csup3.- Csup4.2 Csup5.2 Csup6.2 Csup7.2 Csup8.2 Csup9.2 Csup10.2 Csup11.2 Csup12.- Csup13.- Csup14.- Csup15.- Csup16.- Csup17.2 Csup18.2 Csup19.2 Csup20.2 Csup21.2 ExtReset.2 FCT_con.A1 FCT_con.A4 FCT_con.A5 FCT_con.A8 FCT_con.A9 FCT_con.A12 FCT_con.A13 FCT_con.A16 FCT_con.A17 FCT_con.A20 FCT_con.A21 FCT_con.A24 FCT_con.A25 FCT_con.A28 FCT_con.A29 FCT_con.A32 FCT_con.A33 FCT_con.A36 FCT_con.A37 FCT_con.A40 FCT_con.B2 FCT_con.B3 FCT_con.B6 FCT_con.B7 FCT_con.B10 FCT_con.B11 FCT_con.B14 FCT_con.B15 FCT_con.B18 FCT_con.B19 FCT_con.B22 FCT_con.B23 FCT_con.B26 FCT_con.B27 FCT_con.B30 FCT_con.B31 FCT_con.B34 FCT_con.B35 FCT_con.B38 FCT_con.B39 FCT_con.C1 FCT_con.C4 FCT_con.C5 FCT_con.C8 FCT_con.C9 FCT_con.C12 FCT_con.C13 FCT_con.C16 FCT_con.C17 FCT_con.C20 FCT_con.C21 FCT_con.C24 FCT_con.C25 FCT_con.C28 FCT_con.C29 FCT_con.C32 FCT_con.C33 FCT_con.C36 FCT_con.C38 FCT_con.C40 FCT_con.D2 FCT_con.D3 FCT_con.D6 FCT_con.D7 FCT_con.D10 FCT_con.D13 FCT_con.D16 FCT_con.D19 FCT_con.D22 FCT_con.D25 FCT_con.D28 FCT_con.D37 FCT_con.D39 FCT_con.E1 FCT_con.E4 FCT_con.E5 FCT_con.E8 FCT_con.E11 FCT_con.E14 FCT_con.E17 FCT_con.E20 FCT_con.E23 FCT_con.E26 FCT_con.E29 FCT_con.E32 FCT_con.E35 FCT_con.E38 FCT_con.E40 FCT_con.F2 FCT_con.F3 FCT_con.F6 FCT_con.F9 FCT_con.F12 FCT_con.F15 FCT_con.F18 FCT_con.F21 FCT_con.F24 FCT_con.F27 FCT_con.F30 FCT_con.F33 FCT_con.F36 FCT_con.F39 FCT_con.G1 FCT_con.G4 FCT_con.G5 FCT_con.G8 FCT_con.G11 FCT_con.G14 FCT_con.G17 FCT_con.G20 FCT_con.G23 FCT_con.G26 FCT_con.G29 FCT_con.G32 FCT_con.G35 FCT_con.G38 FCT_con.G40 FCT_con.H3 FCT_con.H6 FCT_con.H9 FCT_con.H12 FCT_con.H15 FCT_con.H18 FCT_con.H21 FCT_con.H24 FCT_con.H27 FCT_con.H30 FCT_con.H33 FCT_con.H36 FCT_con.H39 FCT_con.J1 FCT_con.J4 FCT_con.J5 FCT_con.J8 FCT_con.J11 FCT_con.J14 FCT_con.J17 FCT_con.J23 FCT_con.J26 FCT_con.J29 FCT_con.J32 FCT_con.J35 FCT_con.J38 FCT_con.J40 FCT_con.K2 FCT_con.K3 FCT_con.K6 FCT_con.K9 FCT_con.K12 FCT_con.K15 FCT_con.K18 FCT_con.K21 FCT_con.K24 FCT_con.K27 FCT_con.K30 FCT_con.K33 FCT_con.K36 FCT_con.K39 InChCon1_In_ch1.B4 InChCon1_In_ch1.B6 InChCon1_In_ch1.B8 InChCon1_In_ch1.B10 InChCon1_In_ch1.B12 InChCon1_In_ch1.B14 InChCon1_In_ch1.B16 InChCon1_In_ch1.B18 InChCon1_In_Ch2.B4 InChCon1_In_Ch2.B6 InChCon1_In_Ch2.B8 InChCon1_In_Ch2.B10 InChCon1_In_Ch2.B12 InChCon1_In_Ch2.B14 InChCon1_In_Ch2.B16 InChCon1_In_Ch2.B18 InChCon1_In_Ch3.B4 InChCon1_In_Ch3.B6 InChCon1_In_Ch3.B8 InChCon1_In_Ch3.B10 InChCon1_In_Ch3.B12 InChCon1_In_Ch3.B14 InChCon1_In_Ch3.B16 InChCon1_In_Ch3.B18 InChCon1_In_Ch4.B4 InChCon1_In_Ch4.B6 InChCon1_In_Ch4.B8 InChCon1_In_Ch4.B10 InChCon1_In_Ch4.B12 InChCon1_In_Ch4.B14 InChCon1_In_Ch4.B16 InChCon1_In_Ch4.B18 InChCon1_In_Ch5.B4 InChCon1_In_Ch5.B6 InChCon1_In_Ch5.B8 InChCon1_In_Ch5.B10 InChCon1_In_Ch5.B12 InChCon1_In_Ch5.B14 InChCon1_In_Ch5.B16 InChCon1_In_Ch5.B18 R8.1 R9.2 R9_In_ch1.1 R9_In_Ch2.1 R9_In_Ch3.1 R9_In_Ch4.1 R9_In_Ch5.1 RL4.2 U1.A1 U1.A11 U1.A12 U1.A22 U1.AA2 U1.AA11 U1.AA12 U1.AA22 U1.AB1 U1.AB11 U1.AB12 U1.AB22 U1.B11 U1.B12 U1.C5 U1.C9 U1.C11 U1.C12 U1.C14 U1.C16 U1.D3 U1.E18 U1.E20 U1.F3 U1.F5 U1.F12 U1.G2 U1.G20 U1.G21 U1.G22 U1.H8 U1.H10 U1.H12 U1.H13 U1.H14 U1.J9 U1.J15 U1.K3 U1.K10 U1.K11 U1.K12 U1.K13 U1.K16 U1.K20 U1.L8 U1.L10 U1.L11 U1.L12 U1.L13 U1.L15 U1.L17 U1.L20 U1.M7 U1.M10 U1.M11 U1.M12 U1.M13 U1.M17 U1.N3 U1.N8 U1.N10 U1.N11 U1.N12 U1.N13 U1.N15 U1.P8 U1.P16 U1.P19 U1.R7 U1.R9 U1.R11 U1.R13 U1.T1 U1.T2 U1.T8 U1.T12 U1.T21 U1.T22 U1.U3 U1.U5 U1.V18 U1.V20 U1.W3 U1.Y5 U1.Y9 U1.Y11 U1.Y12 U1.Y16 U1.Y18 U1.Y20 U3.2 U3.10 UG1.2 UG2.5 UL1.3 UL1.4 UL1.12 Usup1.1 Usup2.1 Usup3.1 Usup4.1 Usup5.1 Usup_ch1_In_ch1.1 Usup_ch1_In_Ch2.1 Usup_ch1_In_Ch3.1 Usup_ch1_In_Ch4.1 Usup_ch1_In_Ch5.1 UsupIn.3 | length 294.8
  Top Layer w0.175: v1(147.5,109) 150,109 U1.G2@150.5,108.5 ; v1(149,93) U1.AB1@149.5,93.5 ; v1(149,100) U1.T1@149.5,99.5 U1.T2@150.5,99.5 ; v1(149,115) U1.A1@149.5,114.5 ; v1(150,94) U1.AA2@150.5,94.5 ; v1(151,96) U1.W3@151.5,96.5 ; v1(151,98) U1.U3@151.5,98.5 ; v1(151,102) U1.N3@151.5,102.5 ; v1(151,106) U1.K3@151.5,105.5 ; v1(151,110) U1.F3@151.5,109.5 ; v1(151,112) U1.D3@151.5,111.5 ; v1(153,95) U1.Y5@153.5,95.5 ; v1(153,98) U1.U5@153.5,98.5 ; v1(153,110) U1.F5@153.5,109.5 ; v1(153,112) U1.C5@153.5,112.5 ; v1(155,100) U1.R7@155.5,100.5 ; v1(155,103) U1.M7@155.5,103.5 ; v1(156,99) U1.T8@156.5,99.5 ; v1(156,101) U1.P8@156.5,101.5 ; v1(156,102) U1.N8@156.5,102.5 ; v1(156,105) U1.L8@156.5,104.5 ; v1(156,108) U1.H8@156.5,107.5 ; v1(157,95) U1.Y9@157.5,95.5 ; v1(157,100) U1.R9@157.5,100.5 ; v1(157,107) U1.J9@157.5,106.5 ; v1(157,113) U1.C9@157.5,112.5 ; v1(158,102) U1.N10@158.5,102.5 ; v1(158,103) U1.M10@158.5,103.5 ; v1(158,105) U1.L10@158.5,104.5 ; v1(158,106) U1.K10@158.5,105.5 ; v1(158,108) U1.H10@158.5,107.5 ; v1(159,100) U1.R11@159.5,100.5 ; v1(159,102) U1.N11@159.5,102.5 ; v1(159,103) U1.M11@159.5,103.5 ; v1(159,105) U1.L11@159.5,104.5 ; v1(159,106) U1.K11@159.5,105.5 ; U1.Y11@159.5,95.5 v1(159,95) U1.AA11@159.5,94.5 ; U1.C11@159.5,112.5 v1(159,113) U1.B11@159.5,113.5 ; U1.A11@159.5,114.5 U1.B11@159.5,113.5 ; U1.A11@159.6,114.5 U1.A12@160.5,114.5 U1.B12@160.5,113.5 ; U1.Y12@160.5,95.5 v1(161,95) U1.AA12@160.5,94.5 ; U1.T12@160.5,99.5 v1(161,99) ; U1.N12@160.5,102.5 v1(161,102) ; U1.M12@160.5,103.5 v1(161,103) ; U1.L12@160.5,104.5 v1(161,105) ; U1.K12@160.5,105.5 v1(161,106) ; U1.H12@160.5,107.5 v1(161,108) ; U1.F12@160.5,109.5 v1(161,110) ; U1.C12@160.5,112.5 v1(161,113) U1.B12@160.5,113.5 ; U1.R13@161.5,100.5 v1(162,100) ; U1.N13@161.5,102.5 v1(162,102) ; U1.M13@161.5,103.5 v1(162,103) ; U1.L13@161.5,104.5 v1(162,105) ; U1.K13@161.5,105.5 v1(162,106) ; U1.H13@161.5,107.5 v1(162,108) ; U1.H14@162.5,107.5 v1(163,108) ; U1.C14@162.5,112.5 v1(163,113) ; U1.N15@163.5,102.5 v1(164,102) ; U1.L15@163.5,104.5 v1(164,105) ; U1.J15@163.5,106.5 v1(164,107) ; U1.Y16@164.5,95.5 v1(165,95) ; U1.P16@164.5,101.5 v1(165,101) ; U1.K16@164.5,105.5 v1(165,106) ; U1.C16@164.5,112.5 v1(165,113) ; U1.M17@165.5,103.5 v1(166,103) ; U1.L17@165.5,104.5 v1(166,105) ; U1.Y18@166.5,95.5 v1(167,95) ; U1.V18@166.5,97.5 v1(167,97) ; U1.E18@166.5,110.5 v1(167,111) ; U1.P19@167.5,101.5 v1(168,101) ; U1.Y20@168.5,95.5 v1(169,95) ; U1.V20@168.5,97.5 v1(169,97) ; U1.L20@168.5,104.5 v1(169,105) ; U1.K20@168.5,105.5 v1(169,106) ; U1.G20@168.5,108.5 v1(169,109) U1.G21@169.5,108.5 U1.G22@170.5,108.5 ; U1.E20@168.5,110.5 v1(169,111) ; U1.T21@169.5,99.5 v1(170,100) U1.T22@170.5,99.5 ; U1.AA22@170.5,94.5 v1(171,94) ; U1.A22@170.5,114.5 v1(171,115) ; U1.AA11@159.5,94.5 U1.AB11@159.5,93.5 U1.AB12@160.5,93.5 U1.AA12@160.5,94.5 ; U1.AA11@159.5,94.5 U1.AA12@160.5,94.5 ; U1.B11@159.5,113.5 U1.B12@160.5,113.5
  Top Layer w0.2: v4(154.58,134) UG2.5@154.58,135.5 ; C17.1@157,143.5 C17.1@157.254,143.5 v4(158.5,143.5) ; UG1.2@163.92,140 v4(165.5,140) ; Csup4.2@193.214,61 Csup4.2@193.468,61
  Top Layer w0.5: C2_In_ch1.-@32.385,56.97 32.385,54.115 v3(32.5,54) ; R9_In_ch1.1@35.281,63.447 35.553,63.447 v3(36.5,62.5) ; Usup_ch1_In_ch1.1@41.656,58.748 42.037,59.129 v3(42.037,61.5) C3_In_ch1.2@42.037,63.091 ; C2_In_Ch2.-@52.705,56.97 52.705,54.115 v3(52.82,54) ; R9_In_Ch2.1@55.601,63.447 55.873,63.447 v3(56.82,62.5) ; Usup_ch1_In_Ch2.1@61.976,58.748 62.357,59.129 v3(62.357,61.5) C3_In_Ch2.2@62.357,63.091 ; C2_In_Ch3.-@73.025,56.97 73.025,54.115 v3(73.14,54) ; R9_In_Ch3.1@75.921,63.447 76.193,63.447 v3(77.14,62.5) ; Usup_ch1_In_Ch3.1@82.296,58.748 82.677,59.129 v3(82.677,61.5) C3_In_Ch3.2@82.677,63.091 ; C2_In_Ch4.-@93.345,56.97 93.345,54.115 v3(93.46,54) ; R9_In_Ch4.1@96.241,63.447 96.513,63.447 v3(97.46,62.5) ; Usup_ch1_In_Ch4.1@102.616,58.748 102.997,59.129 v3(102.997,61.5) C3_In_Ch4.2@102.997,63.091 ; CLED.2@105.5,141.58 CLED.2@105.5,141.834 v3(105.5,144) ; CLED1.2@110.5,131.746 CLED1.2@110.5,131.96 CLED1.2@110.5,132.214 110.5,133.2 115.5,133.2 ; C2_In_Ch5.-@113.5,56.92 113.5,54.065 v3(113.615,53.95) ; CLED2.2@115.5,131.746 115.5,133.2 ; R9_In_Ch5.1@116.396,63.397 116.668,63.397 v3(117.615,62.45) ; CLED3.2@120.5,131.746 120.5,133.2 115.5,133.2 ; Usup_ch1_In_Ch5.1@122.786,58.7 123.317,59.231 C3_In_Ch5.2@123.317,63.091 ; v3(131.968,143.214) 131.968,142.746 133.5,141.214 Csup12.-@134.88,141.214 134.88,137.88 Usup1.1@134,137 ; Csup14.-@137,66.88 140.334,66.88 Usup3.1@141.214,66 Csup19.2@141.214,63.5 ; Csup15.-@137.3,48 137.3,49.38 140.634,49.38 141.2,48.814 141.2,46.268 Csup20.2@141.468,46 142.968,44.5 v3(144.8,44.5) 146.086,44.5 Csup7.2@147.8,46.214 ; Csup19.2@141.468,63.144 142.612,62 v3(144.5,62) 145.786,62 Csup9.2@147.488,63.702 ; Csup9.2@147.31,63.702 Csup9.2@147.488,63.702 ; Csup7.2@147.5,46.468 Csup7.2@147.8,46.468 Csup7.2@148.156,46.468 v3(149,46.468) 149.468,46.468 151,48 Csup13.-@151,49.38 154.334,49.38 Usup2.1@155.214,48.5 Csup18.2@155.214,46 ; Csup9.2@147.5,63.714 Csup9.2@147.488,63.702 ; Csup21.2@155.024,63.234 155.024,65.734 154.144,66.614 150.81,66.614 150.81,65.234 149.278,63.702 v3(148.81,63.702) Csup9.2@147.488,63.702 ; Csup21.2@155.278,62.878 156.422,61.734 v3(159,61.734) 159.596,61.734 Csup8.2@161.31,63.448 ; Csup18.2@155.468,45.644 156.612,44.5 v3(158.5,44.5) 159.786,44.5 Csup10.2@161.5,46.214 ; Csup10.2@161.5,46.468 Csup10.2@161.856,46.468 ; Csup1.-@187.1,59 189.1,61 Csup4.2@193.214,61 ; Csup3.-@187.354,48.5 189.354,50.5 Csup6.2@193.214,50.5 Csup6.2@193.468,50.5 ; Csup2.-@187.354,68 189.354,70 Csup5.2@193.214,70 Csup5.2@193.468,70
  Top Layer w0.508: C1_In_ch1.2@34.925,62.304 R9_In_ch1.1@34.925,63.193 ; C1_In_Ch2.2@55.245,62.304 R9_In_Ch2.1@55.245,63.193 ; C1_In_Ch3.2@75.565,62.304 R9_In_Ch3.1@75.565,63.193 ; C1_In_Ch4.2@95.885,62.304 R9_In_Ch4.1@95.885,63.193 ; C1_In_Ch5.2@116.205,62.304 R9_In_Ch5.1@116.205,63.193
  Bottom Layer w0.175: Cgen1.1@165.468,138.156 165.468,139.968 v4(165.5,140)
  Bottom Layer w0.2: R9.2@144.468,99.644 145.112,99 148,99 v1(149,100) ; R9.2@144.468,100.356 R8.1@144.468,101.144 ; v4(147.4,125.932) C16.1@148.144,125.932 C16.1@148.5,125.932 C16.1@148.5,125.887 ; 148.4,90.5 147.968,90.932 C7.1@147.968,91.144 C7.1@147.968,91.5 C7.1@147.968,91.856 147.968,92.168 v1@148.8,93 ; v1(149,115) 149,115.468 148.146,116.322 C6.1@147.968,116.5 C6.1@147.968,116.856 147.968,117.168 148.3,117.5 151.1,117.5 151.468,117.132 C12.1@151.468,116.856 C12.1@151.468,116.5 ; C10.1@150.222,104 150.5,104.278 150.5,105.5 v1(151,106) ; 150.824,90.5 C13.1@151.468,91.144 ; C19.1@154.222,104 154.8,104 155,103.8 v1(155,103) ; v1(159,95) 159,94.968 C5.1@160,93.968 160,94 v1(161,95) ; v1(159,113) 159.222,113 C9.1@160,113.778 160.222,113.778 v1(161,113) ; C26.1@159.644,105 v1(159,105) v1(159,103) v1(161,103) v1(161,105) C26.1@160.356,105 ; C22.1@160,97.968 160,98 v1(161,99) ; v1@166.032,103.032 C24.1@166.032,103.644 ; C24.1@166.032,104.356 v1@166.032,104.968 ; C15.1@168.532,91.144 169.176,90.5 171.388,90.5 C4.1@172.032,91.144 ; C14.1@168.532,116.856 169.176,117.5 171.388,117.5 C8.1@172.032,116.856 ; v1(169,105) 169.032,105 C11.1@170.032,104 ; 171,93 172.032,91.968 C4.1@172.032,91.856 ; v1(171,115) 172.032,116.032 C8.1@172.032,116.144
  other v3: 205,40 220,40 189.5,50.5 189.5,61 123.3,61.5 189.5,70 205,75 220,75
  other v9: 204.5,90.5 184,119
"HARD RESET_N": FCT_con.A15 U1.C19 | length 44.9
  Top Layer w0.175: U1.C19@167.5,112.5 v1(168,113)
  Top Layer w0.2: v5(210.865,113.72) FCT_con.A15@211.5,113.72
  Mid-Layer 2 w0.175: v1(168,113) 168.5,112.5 209.645,112.5 v5(210.865,113.72)
"HARD RESET_P": FCT_con.A14 U1.D19 | length 47.6
  Top Layer w0.175: U1.D19@167.5,111.5 v1(168,112)
  Top Layer w0.2: v5(210.865,114.99) FCT_con.A14@211.5,114.99
  Mid-Layer 2 w0.175: v1(168,112) 168.5,111.5 209.5,111.5 211.456,113.456 211.456,114.312 210.865,114.903 v5(210.865,114.99)
NCONFIG: R3.2 U1.K5 U3.5 | length 36.5
  Top Layer w0.175: v1(153,106) U1.K5@153.5,105.5
  Mid-Layer 5 w0.175: v1(153,106) 153,107 153.5,107.5 154.5,107.5 156.5,109.5 156.5,116 165.1,124.6 U3.5@165.1,128
  Bottom Layer w0.2: R3.2@146.5,109 147.5,108 149,108 149.5,107.5 152.3,107.5 152.5,107.3 152.5,106.793 153,106.293 v1(153,106)
NetCLED1_1: CLED1.1 RLED1.1 VDLED1.CATH | length 4.2
  Top Layer w0.254: VDLED1.CATH@108,136.5 108,134.794 CLED1.1@110.5,134.794
NetCLED2_1: CLED2.1 RLED2.1 VDLED2.CATH | length 4.2
  Top Layer w0.254: VDLED2.CATH@113,136.5 113,134.794 CLED2.1@115.5,134.794
NetCLED3_1: CLED3.1 RLED3.1 VDLED3.CATH | length 4.2
  Top Layer w0.254: VDLED3.CATH@118,136.5 118,134.794 CLED3.1@120.5,134.794
NetRL1_1: RL1.1 RL2.1 RL3.1 RL4.1 | length 3.9
  Top Layer w0.2: RL1.1@189.3,133.1 RL1.1@189.3,133.456 RL2.1@189.3,134.044 RL2.1@189.3,134.4 RL2.1@189.3,134.756 RL3.1@189.3,135.344 RL3.1@189.3,135.7 RL3.1@189.3,136.056 RL4.1@189.3,136.644 RL4.1@189.3,137
NSTATUS: R5.2 U1.K6 | length 11.1
  Top Layer w0.175: v1(154,106) U1.K6@154.5,105.5
  Bottom Layer w0.2: R5.2@146.5,110.5 R5.2@146.754,110.5 148,110.5 150,108.5 153.3,108.5 153.5,108.3 153.5,106.5 v1(154,106)
PART1_DIGCH1_N: InChCon1_In_ch1.A5 U1.A10 | length 152.5
  Top Layer w0.175: U1.A10@158.5,114.5 v1(159,115)
  Mid-Layer 1 w0.175: InChCon1_In_ch1.A5@34.572,102.92 37.92,102.92 39.5,104.5 39.5,119 48,127.5 73.5,127.5 132.5,127.5 138.5,121.5 158.5,121.5 159,121 v1(159,115)
PART1_DIGCH1_P: InChCon1_In_ch1.A4 U1.B10 | length 152.3
  Top Layer w0.175: U1.B10@158.5,113.5 v1(159,114)
  Mid-Layer 1 w0.175: InChCon1_In_ch1.A4@36.477,104.19 37.79,104.19 39,105.4 39,119.5 47.5,128 133,128 139,122 159,122 159.5,121.5 159.5,114.5 v1(159,114)
PART1_DIGCH2_N: InChCon1_In_ch1.A7 U1.A9 | length 152
  Top Layer w0.175: U1.A9@157.5,114.5 v1(158,115)
  Mid-Layer 1 w0.175: InChCon1_In_ch1.A7@34.572,100.38 38.88,100.38 40.5,102 40.5,118 49,126.5 131.5,126.5 137.5,120.5 157.5,120.5 158,120 v1(158,115)
PART1_DIGCH2_P: InChCon1_In_ch1.A6 U1.B9 | length 151.7
  Top Layer w0.175: U1.B9@157.5,113.5 v1(158,114)
  Mid-Layer 1 w0.175: InChCon1_In_ch1.A6@36.477,101.65 38.65,101.65 40,103 40,118.5 48.5,127 74,127 132,127 138,121 158,121 158.5,120.5 158.5,114.5 v1(158,114)
PART1_DIGCH3_N: InChCon1_In_ch1.A9 U1.A8 | length 152.1
  Top Layer w0.175: U1.A8@156.5,114.5 v1(157,115)
  Mid-Layer 1 w0.175: InChCon1_In_ch1.A9@34.572,97.84 40.84,97.84 41.5,98.5 41.5,117 50,125.5 130.5,125.5 136.5,119.5 156.5,119.5 157,119 v1(157,115)
PART1_DIGCH3_P: InChCon1_In_ch1.A8 U1.B8 | length 151.8
  Top Layer w0.175: U1.B8@156.5,113.5 v1(157,114)
  Mid-Layer 1 w0.175: InChCon1_In_ch1.A8@36.477,99.11 40.61,99.11 41,99.5 41,117.5 49.5,126 75,126 131,126 137,120 157,120 157.5,119.5 157.5,114.5 v1(157,114)
PART1_DIGCH4_N: InChCon1_In_ch1.A11 U1.A7 | length 150.3
  Top Layer w0.175: v1(155,115) U1.A7@155.5,114.5
  Mid-Layer 1 w0.175: InChCon1_In_ch1.A11@34.572,95.3 41.3,95.3 42.5,96.5 42.5,116 51,124.5 76.5,124.5 129.5,124.5 135.5,118.5 154.5,118.5 155,118 v1(155,115)
PART1_DIGCH4_P: InChCon1_In_ch1.A10 U1.B7 | length 150.3
  Top Layer w0.175: U1.B7@155.5,113.5 v1(156,114)
  Mid-Layer 1 w0.175: InChCon1_In_ch1.A10@36.477,96.57 41.07,96.57 42,97.5 42,116.5 50.5,125 76,125 130,125 136,119 155.5,119 156,118.5 v1(156,114)
PART1_DIGCH5_N: InChCon1_In_ch1.A13 U1.A6 | length 149.9
  Top Layer w0.175: v1(154,115) U1.A6@154.5,114.5
  Mid-Layer 1 w0.175: InChCon1_In_ch1.A13@34.572,92.76 42.26,92.76 43.5,94 43.5,115 52,123.5 77.5,123.5 128.5,123.5 134.5,117.5 153.5,117.5 154,117 v1(154,115)
PART1_DIGCH5_P: InChCon1_In_ch1.A12 U1.B6 | length 149.8
  Top Layer w0.175: v1(154,114) U1.B6@154.5,113.5
  Mid-Layer 1 w0.175: InChCon1_In_ch1.A12@36.477,94.03 42.53,94.03 43,94.5 43,115.5 51.5,124 129,124 135,118 154,118 154.5,117.5 154.5,114.5 v1(154,114)
PART1_DIGCH6_N: InChCon1_In_ch1.A15 U1.A4 | length 148.5
  Top Layer w0.175: U1.A4@152.5,114.5 v1(153,115)
  Mid-Layer 1 w0.175: InChCon1_In_ch1.A15@34.572,90.22 41.72,90.22 44.5,93 44.5,114 53,122.5 78.5,122.5 127.5,122.5 133.5,116.5 152.5,116.5 153,116 v1(153,115)
PART1_DIGCH6_P: InChCon1_In_ch1.A14 U1.B4 | length 148.5
  Top Layer w0.175: U1.B4@152.5,113.5 v1(153,114)
  Mid-Layer 1 w0.175: InChCon1_In_ch1.A14@36.477,91.49 41.99,91.49 44,93.5 44,114.5 52.5,123 78,123 128,123 134,117 153,117 153.5,116.5 153.5,114.5 v1(153,114)
PART1_DIGCH7_N: InChCon1_In_ch1.A17 U1.A3 | length 147.2
  Top Layer w0.175: U1.A3@151.5,114.5 v1(152,115)
  Mid-Layer 1 w0.175: InChCon1_In_ch1.A17@34.532,87.68 41.18,87.68 45.5,92 45.5,113 54,121.5 79.5,121.5 126.5,121.5 132.5,115.5 151.5,115.5 v1(152,115)
PART1_DIGCH7_P: InChCon1_In_ch1.A16 U1.B3 | length 147.1
  Top Layer w0.175: U1.B3@151.5,113.5 v1(152,114)
  Mid-Layer 1 w0.175: InChCon1_In_ch1.A16@36.477,88.95 41.45,88.95 45,92.5 45,113.5 53.5,122 79,122 127,122 133,116 152,116 152.5,115.5 152.5,114.5 v1(152,114)
PART1_DIGCH8_N: InChCon1_In_ch1.A19 U1.C3 | length 147.2
  Top Layer w0.175: v1(151,113) U1.C3@151.5,112.5
  Mid-Layer 1 w0.175: InChCon1_In_ch1.A19@34.572,85.14 40.64,85.14 46.5,91 46.5,112 55,120.5 80.5,120.5 125.5,120.5 131.5,114.5 147.5,114.5 148.5,113.5 150.5,113.5 v1(151,113)
PART1_DIGCH8_P: InChCon1_In_ch1.A18 U1.C4 | length 146.2
  Top Layer w0.175: v1(152,113) U1.C4@152.5,112.5
  Mid-Layer 1 w0.175: InChCon1_In_ch1.A18@36.477,86.41 40.91,86.41 46,91.5 46,112.5 54.5,121 80,121 126,121 132,115 148,115 149,114 151,114 v1(152,113)

## Text inside footprints (layer, text, board x,y; h text height)
RLED1: Mechanical 3 "CHIP0805" at 106.73,134.5 h0.51 r270
RLED2: Mechanical 3 "CHIP0805" at 111.73,134.5 h0.51 r270